# Altium PCB DIOT_Sampler 20spacin.PCBDOC (part 1 of 8)
Units mm, origin at the board's own origin, x right, y up, seen from the top; angles counter-clockwise.
Board outline 222.37 x 100 mm, 4 copper layers (Top, GP1(GND), L3, Bot), stack 1.648 mm thick; 680 components, 424 nets, 2212 pads, 808 vias.
Unrouted connection lines stored in the file: 327.
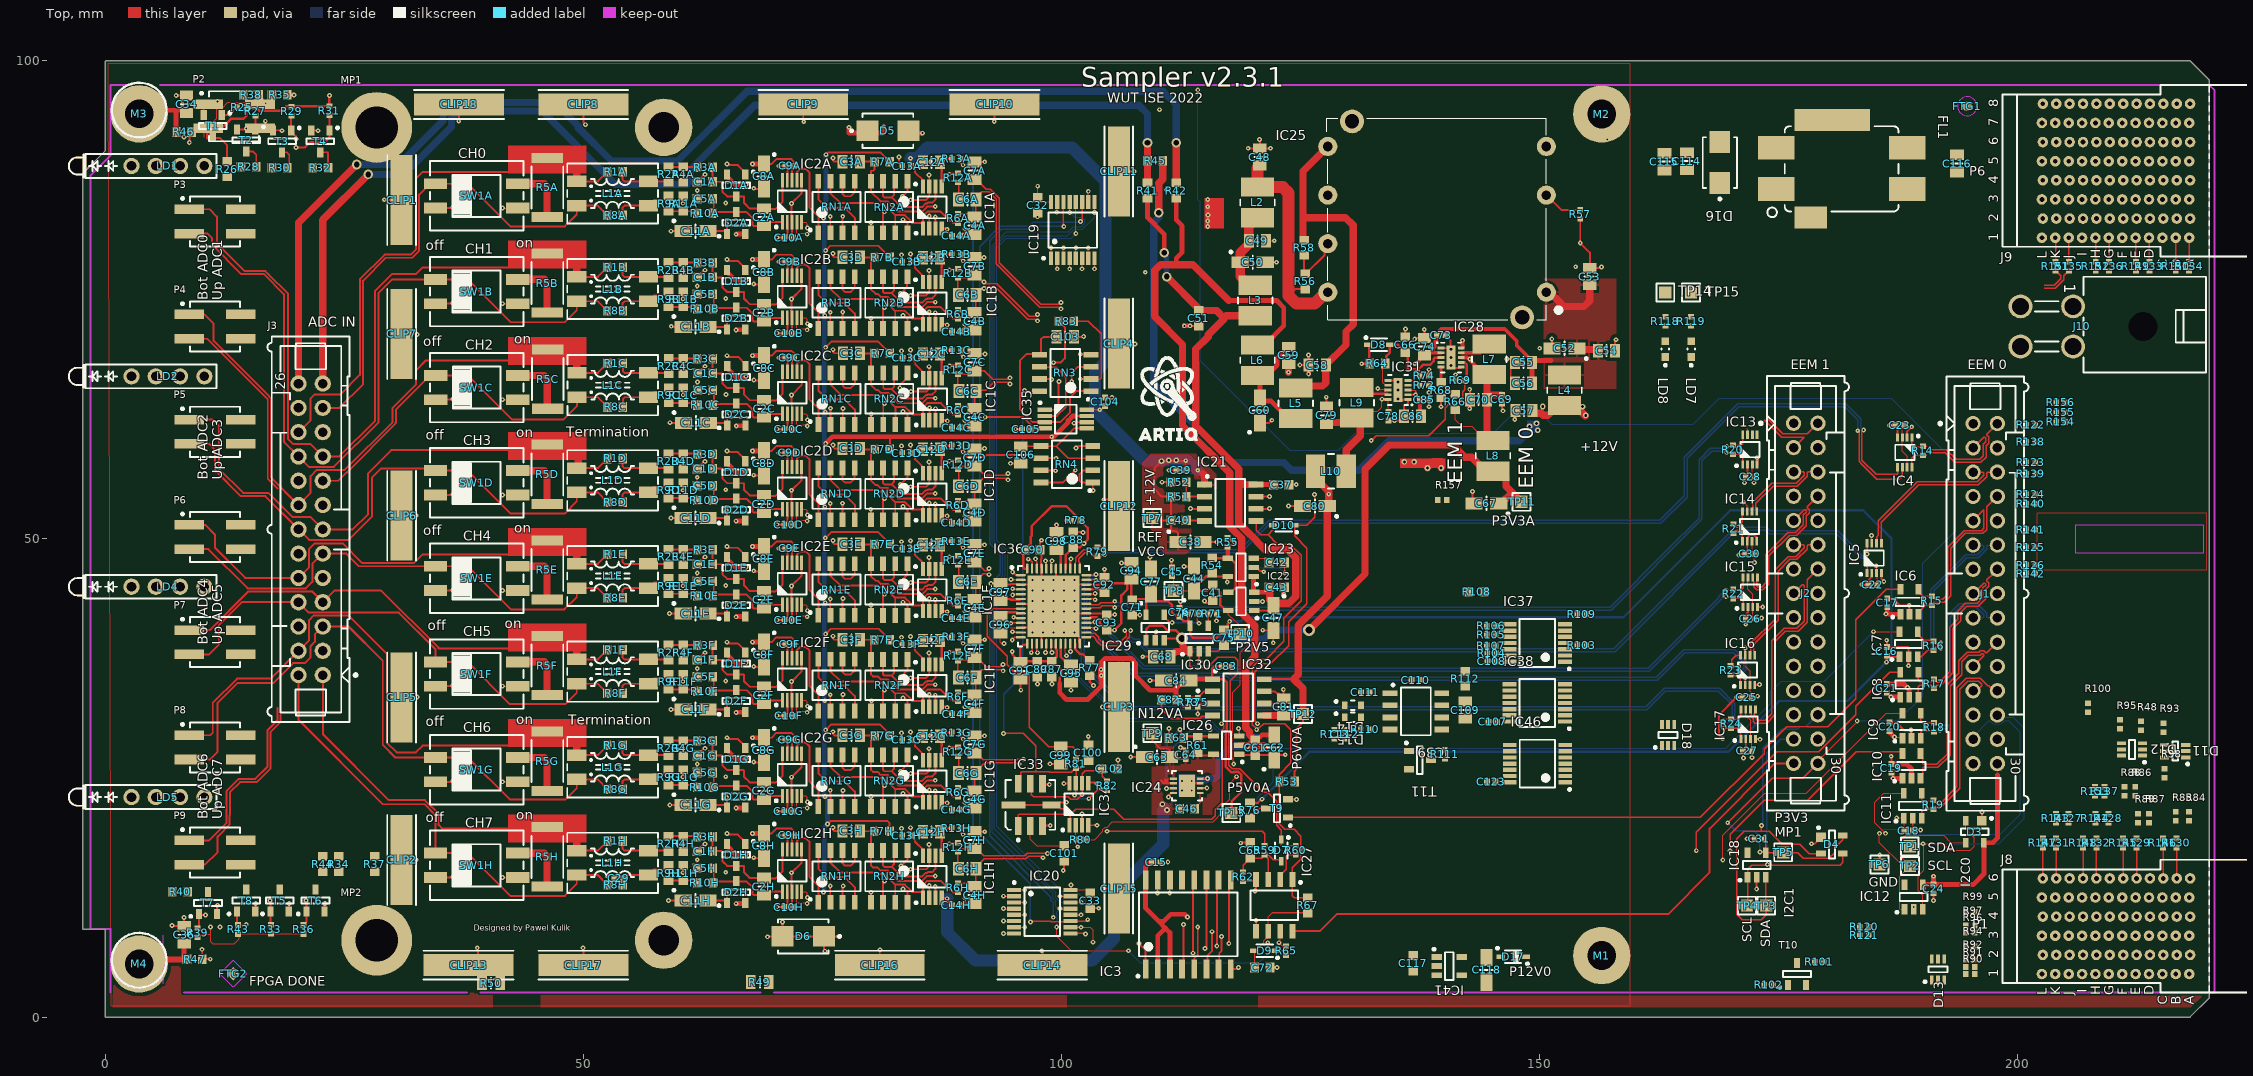
[diagram p0: Top view]
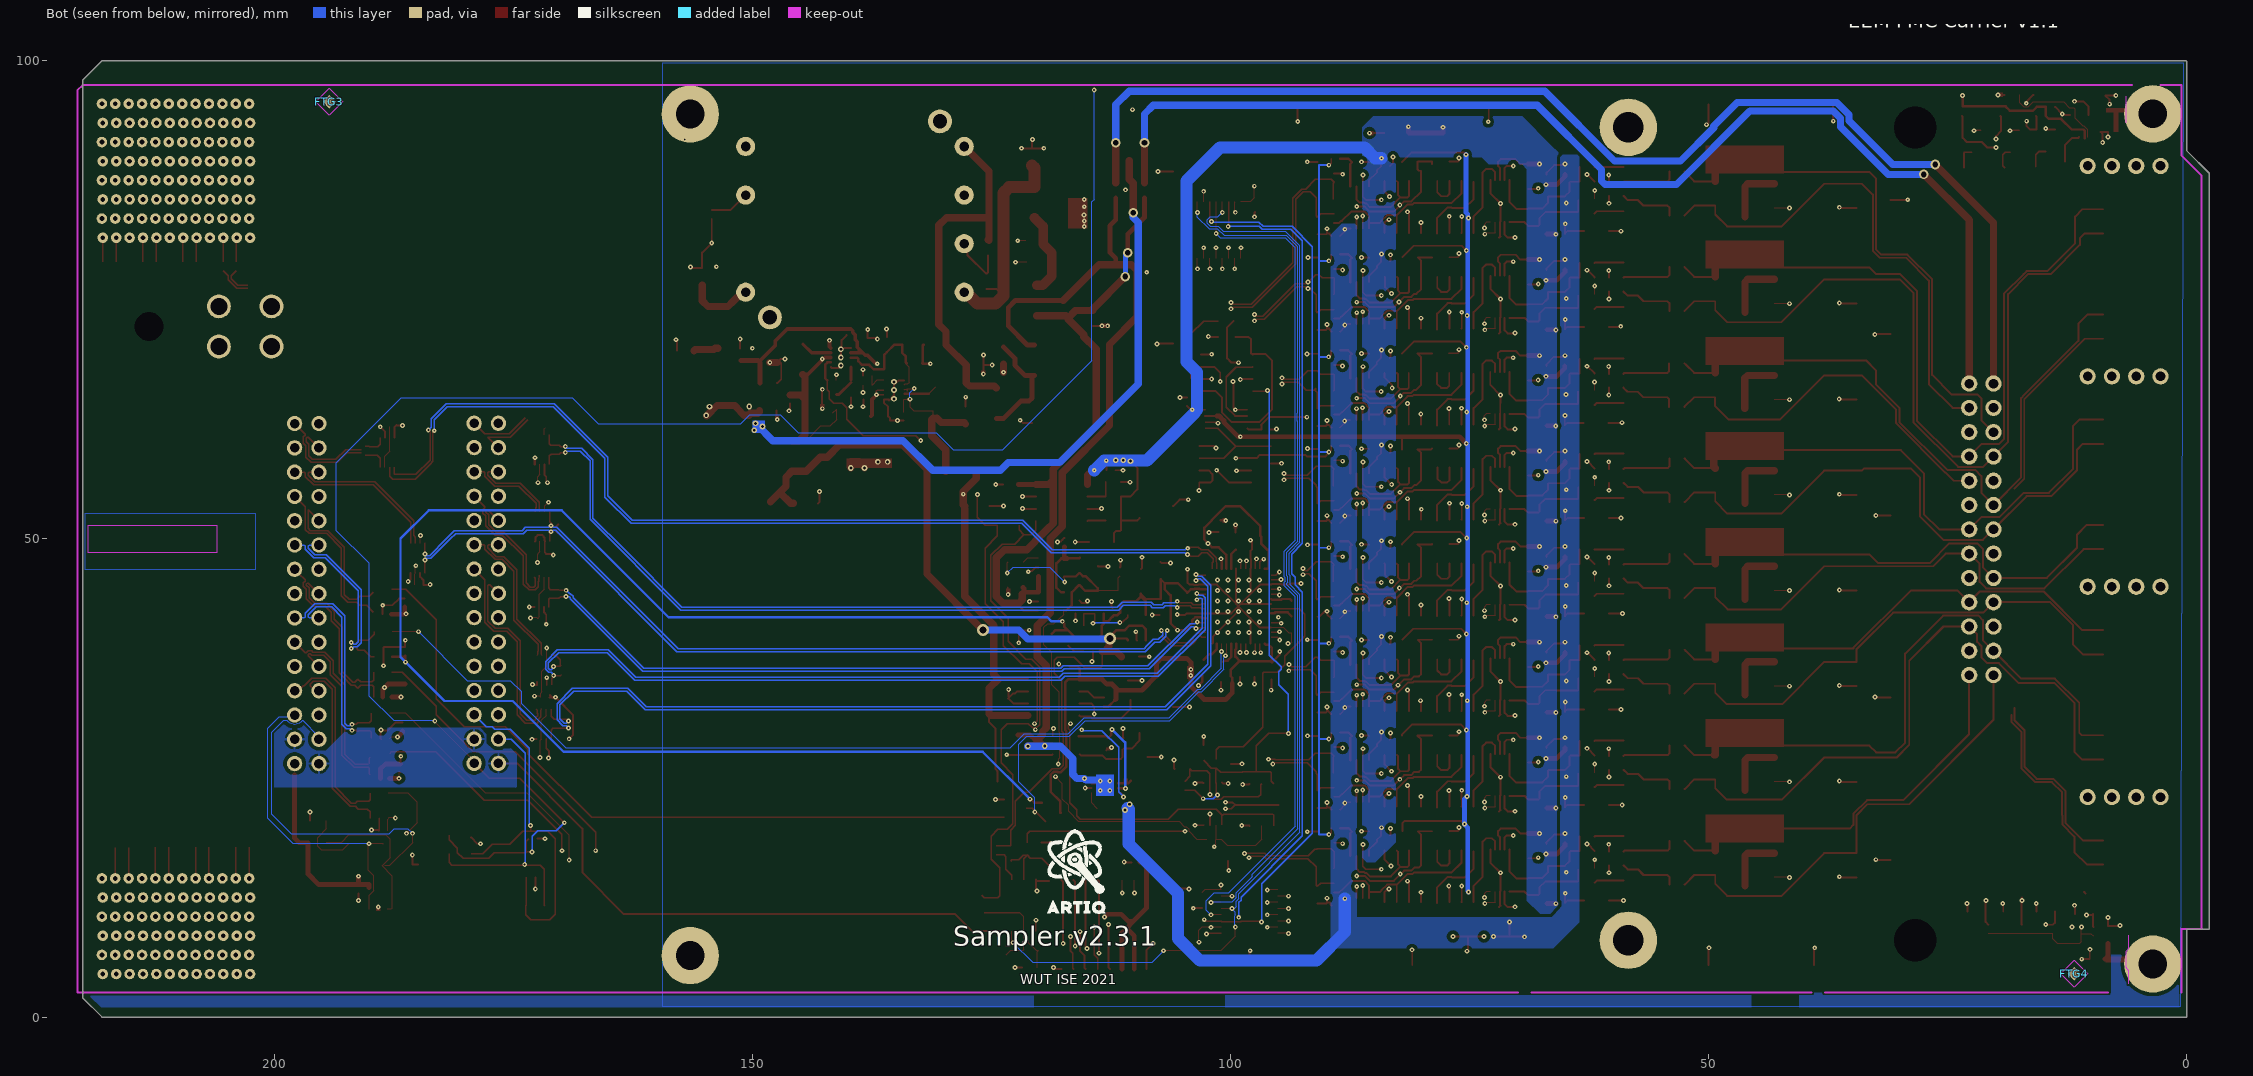
[diagram p1: Bot view, seen from below]
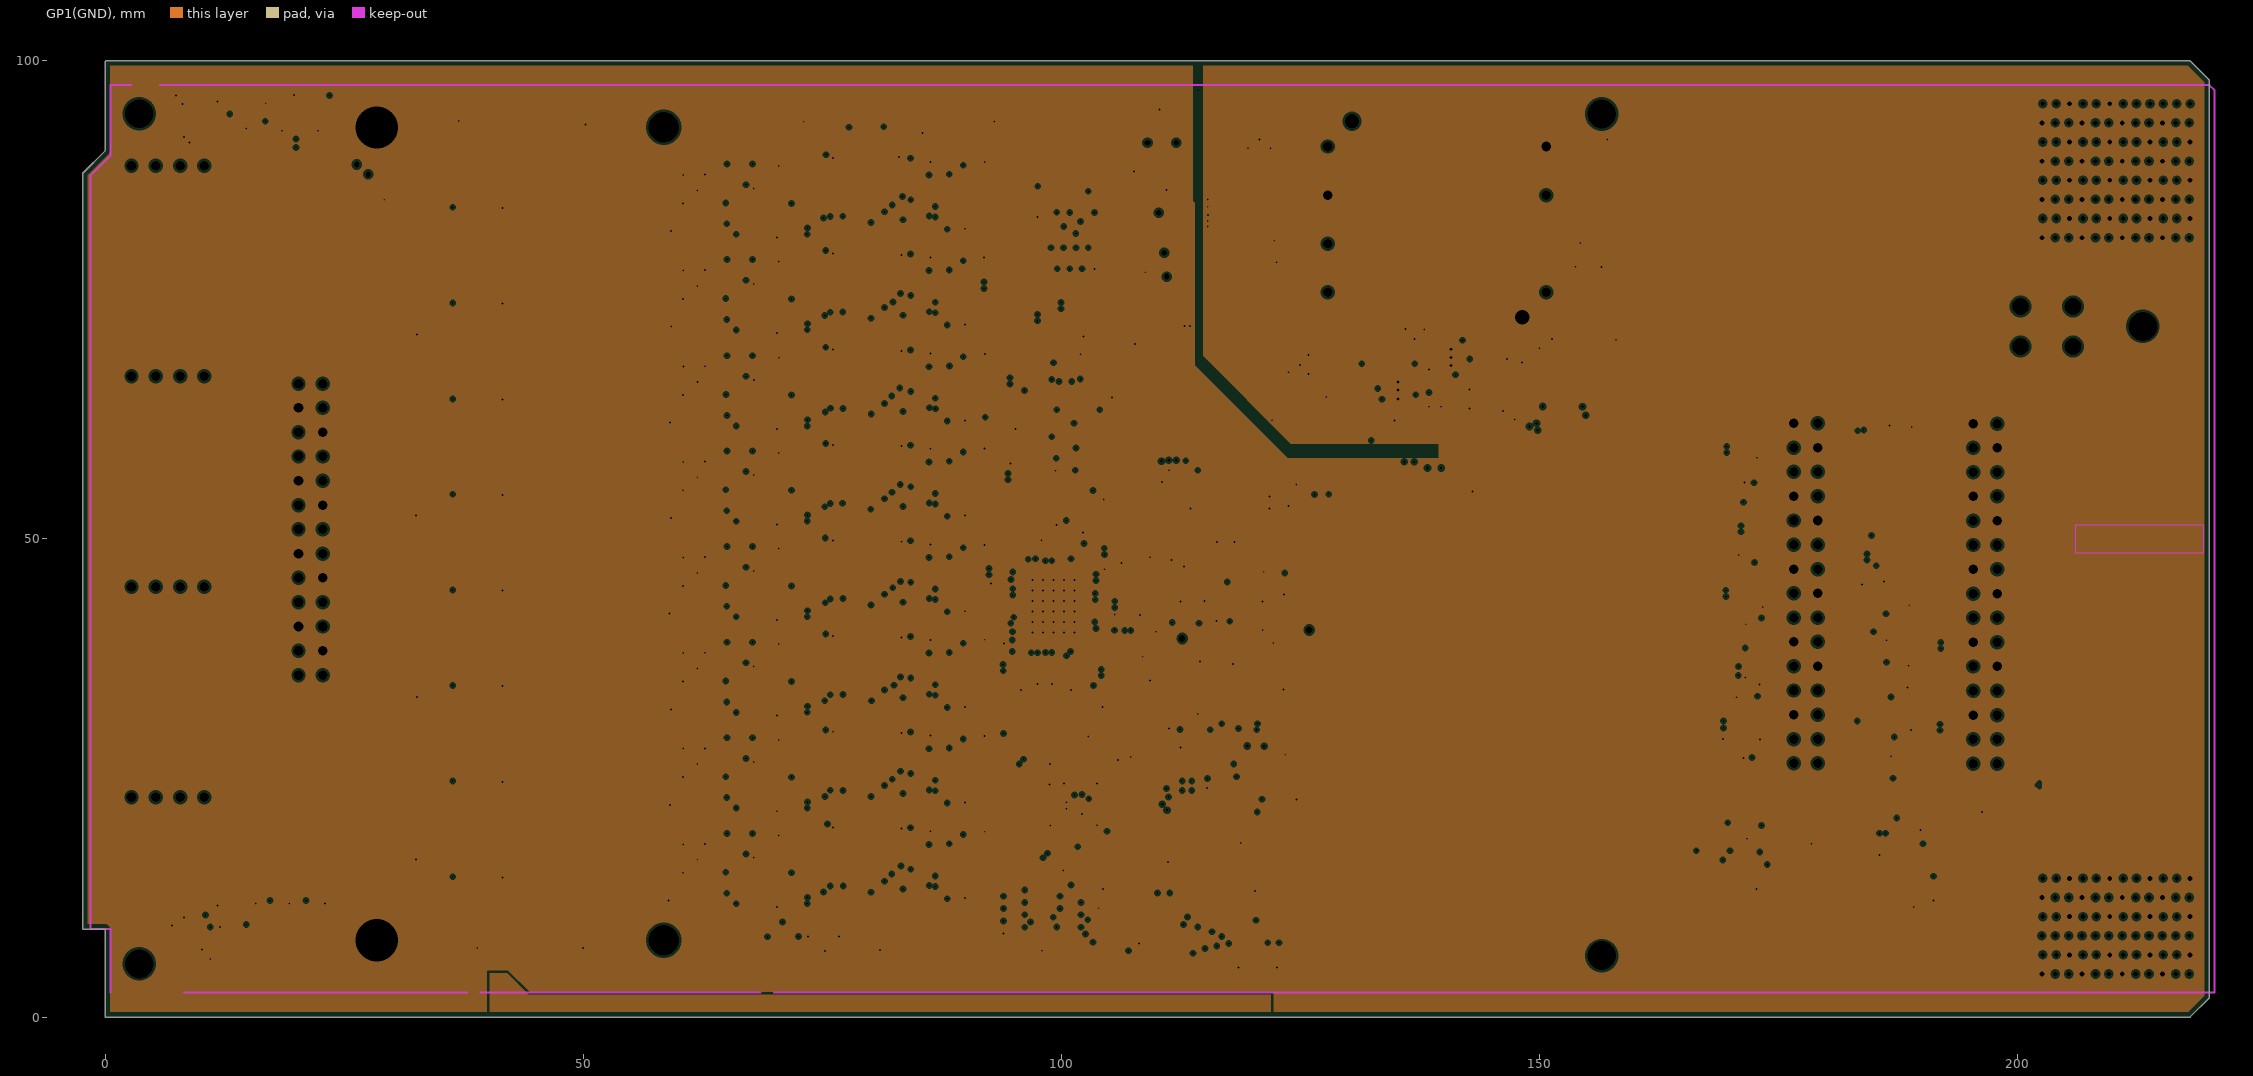
[diagram p2: GP1(GND), clearances drawn from the general rule]
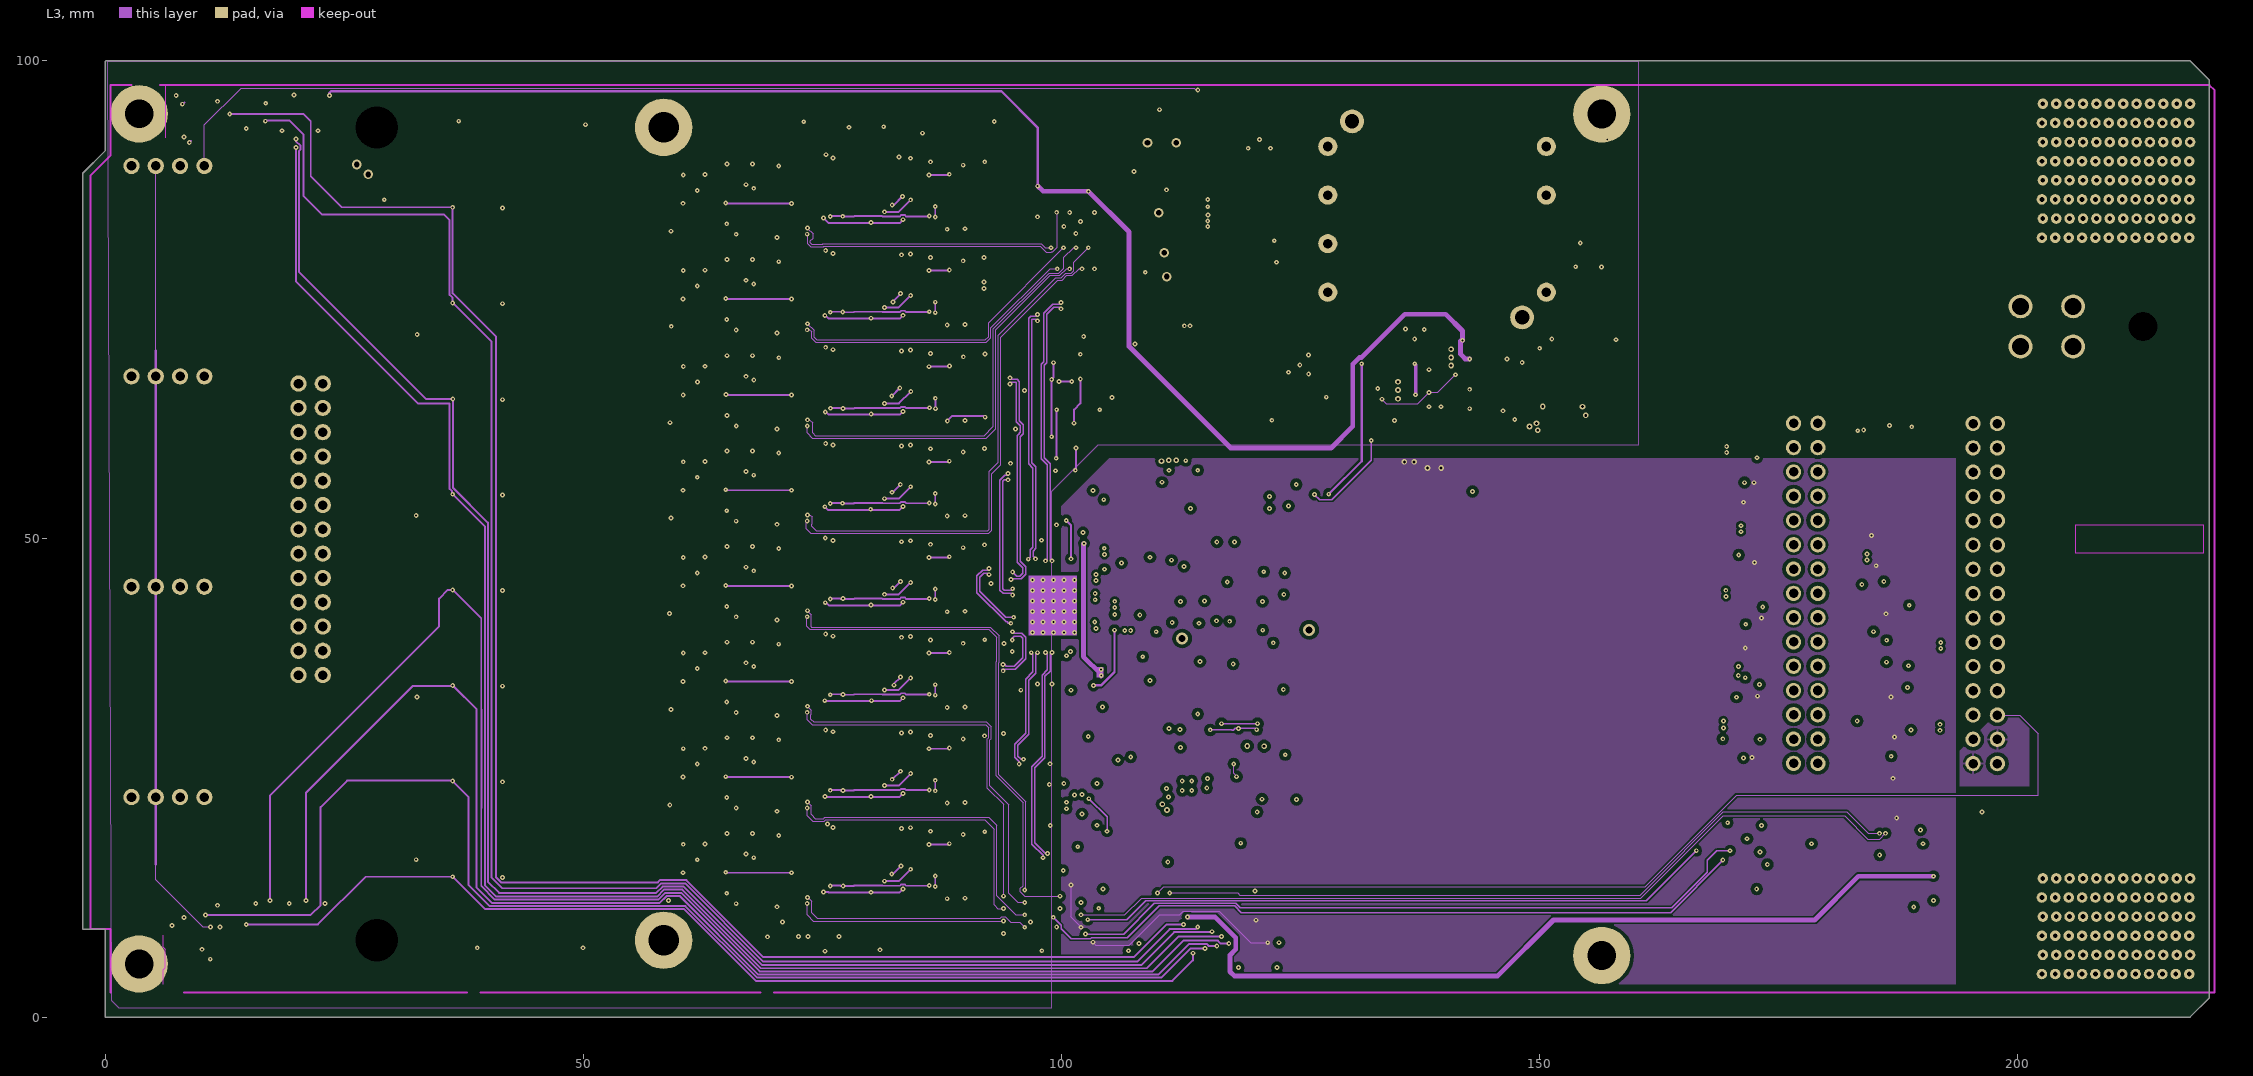
[diagram p3: L3]

## Layer stack, top to bottom
TopSolder: solder mask 0.0102, Solder Resist, Dk 3.5
Top: signal copper 0.058
Dielectric1: core 0.18, FR-4, Dk 4.8
GP1(GND): plane copper 0.036, net GND
Dielectric 3: prepreg 1.1, Dk 4.2
L3: signal copper 0.036
Dielectric2: core 0.18, FR-4, Dk 4.2
Bot: signal copper 0.058
BottomSolder: solder mask 0.0102, Solder Resist, Dk 3.5

## Board outline
-2.33,9.2 -2.33,88.245 0,90.575 0,99.899 0.101,100 218.039,100 220.039,98 220.039,2 218.039,0 0,0 0,9.2

## Design rules (kind name [scope] priority, off if disabled: settings)
AcuteAngle [All] p1: minimum=6.00000000000000E+0001 checktracksonly=FALSE
Clearance Clearance_DIFF [(InDifferentialPairClass('All Differential Pairs'))] p1: gap=0.127 ignorepadtopadclearanceinfootprint=FALSE except(0: Arc-Hole Track-Hole SMDPad-Hole THPad-Hole Via-Hole Fill-Hole Poly-Hole Region-Hole Text-Hole; 0.254: Arc-Poly Track-Poly SMDPad-Poly THPad-Poly Via-Poly Fill-Poly Poly-Poly Poly-Region Poly-Text)
Clearance [All] p2: gap=0.127 ignorepadtopadclearanceinfootprint=FALSE except(0: Arc-Hole Track-Hole SMDPad-Hole THPad-Hole Via-Hole Fill-Hole Poly-Hole Region-Hole Text-Hole; 0.203: Track-Poly; 0.381: Arc-Poly SMDPad-Poly THPad-Poly Via-Poly Fill-Poly Poly-Poly)
ComponentClearance [All] p1 off: gap=0.254 collisioncheckmode=3 verticalgap=0.254 showdistances=FALSE
DiffPairsRouting [All] p1: maxlimit=0.178 minlimit=0.152 mostfreqgap=0.152 toplayer_minwidth=0.127 toplayer_maxwidth=0.152 toplayer_prefwidth=0.152 midlayer1_minwidth=0.127 midlayer1_maxwidth=0.152 midlayer1_prefwidth=0.152 bottomlayer_minwidth=0.127 bottomlayer_maxwidth=0.152 bottomlayer_prefwidth=0.152 maxuncoupledlength=12.7
FabricationTestPointUsage TestPointUsage [All] p1: valid=0 allowmultiple=FALSE
FabricationTestpoint Testpoint [All] p1: side=3 testpointundercomponent=TRUE minsize=1.016 maxsize=2.54 preferedsize=1.524 minholesize=0.508 maxholesize=1.016 preferedholesize=0.813 testpointgrid=0.025 allowsidetop=TRUE allowsidebottom=TRUE usegrid=TRUE gridtolerance=0
Height [All] p1 off: minheight=0 maxheight=25.4 prefheight=12.7
HoleSize [All] p1: absolutevalues=TRUE maxlimit=3.81 minlimit=0.025 maxpercent=80.000 minpercent=20.000
HoleToHoleClearance [All] p1: gap=0.025 allowstackedmicrovias=TRUE
MinimumSolderMaskSliver [All] p1: minsoldermaskwidth=0
PlaneClearance [All] p1: clearance=0.254
PlaneConnect [All] p1: planeconnectstyle=Direct reliefexpansion=0.508 reliefentries=4 reliefconductorwidth=0.254 reliefairgap=0.254
PolygonConnect PolygonConnect_pad [(InPadClass('All Pads'))] p1: connectstyle=Relief reliefconductorwidth=0.254 reliefentries=4 polygonreliefangle="90 Angle" airgapwidth=0.254
PolygonConnect [All] p2: connectstyle=Direct reliefconductorwidth=0.254 reliefentries=4 polygonreliefangle="45 Angle" airgapwidth=0.254
RoutingVias [All] p1: holewidth=0.2 width=0.5 viastyle="Through Hole" minholewidth=0.2 minwidth=0.5 maxholewidth=0.711 maxwidth=1.27
SilkToSilkClearance [All] p1: silktosilkclearance=0
SilkToSolderMaskClearance SilkscreenOverComponentPads [IsPad] p1: minsilkscreentomaskgap=0 clearancetoexposedcopper=TRUE
SolderMaskExpansion [All] p1: expansion=0.051 istentingtop=FALSE
SupplyNets "Schematic Supply Nets_8" [InNet('P3V3_MP2')] p1: voltage=0.000
SupplyNets "Schematic Supply Nets_27" [InNet('STRIP1')] p2: voltage=0.000
SupplyNets "Schematic Supply Nets_26" [InNet('P13V0S')] p3: voltage=0.000
SupplyNets "Schematic Supply Nets_25" [InNet('N12V0A')] p4: voltage=0.000
SupplyNets "Schematic Supply Nets_24" [InNet('P12V0_DIOT')] p5: voltage=0.000
SupplyNets "Schematic Supply Nets_23" [InNet('P3V3_DIOT')] p6: voltage=0.000
SupplyNets "Schematic Supply Nets_22" [InNet('P3V3_MP1')] p7: voltage=0.000
SupplyNets "Schematic Supply Nets_21" [InNet('P13V0')] p8: voltage=0.000
SupplyNets "Schematic Supply Nets_20" [InNet('P3V3')] p9: voltage=0.000
SupplyNets "Schematic Supply Nets_19" [InNet('P5V0A')] p10: voltage=0.000
SupplyNets "Schematic Supply Nets_18" [InNet('P3V3_MP')] p11: voltage=0.000
SupplyNets "Schematic Supply Nets_16" [InNet('REF_P2V048')] p12: voltage=0.000
SupplyNets "Schematic Supply Nets_14" [InNet('REF_P1V7066')] p13: voltage=0.000
SupplyNets "Schematic Supply Nets_13" [InNet('P6V0A')] p14: voltage=0.000
SupplyNets "Schematic Supply Nets_11" [InNet('REF_VCC')] p15: voltage=0.000
SupplyNets "Schematic Supply Nets_10" [InNet('GND')] p16: voltage=0.000
SupplyNets "Schematic Supply Nets_9" [InNet('P2V5A')] p17: voltage=0.000
SupplyNets "Schematic Supply Nets_7" [InNet('N13V0')] p18: voltage=0.000
SupplyNets "Schematic Supply Nets_6" [InNet('P12V0A')] p19: voltage=0.000
SupplyNets "Schematic Supply Nets_5" [InNet('P3V3A')] p20: voltage=0.000
SupplyNets "Schematic Supply Nets_4" [InNet('N13V0S')] p21: voltage=0.000
SupplyNets "Schematic Supply Nets_3" [InNet('P12V0')] p22: voltage=0.000
SupplyNets "Schematic Supply Nets_2" [InNet('REF_P4V096')] p23: voltage=0.000
SupplyNets "Schematic Supply Nets_1" [InNet('P3V3_MP0')] p24: voltage=0.000
SupplyNets "Schematic Supply Nets" [InNet('P6V0')] p25: voltage=0.000
Width [All] p1: maxlimit=1.27 minlimit=0.127 preferedwidth=0.127
18 further rules are at their usual default settings.

## Classes and differential pairs
net class LVDS_DUAL_P[0..4]: LVDS_DUAL_P0 LVDS_DUAL_P1 LVDS_DUAL_P2 LVDS_DUAL_P3 LVDS_DUAL_P4
net class LVDS_DUAL_N[0..4]: LVDS_DUAL_N0 LVDS_DUAL_N1 LVDS_DUAL_N2 LVDS_DUAL_N3 LVDS_DUAL_N4
net class SHARED_BUS_[0..4]: SHARED_BUS_0 SHARED_BUS_1 SHARED_BUS_2 SHARED_BUS_3 SHARED_BUS_4
net class GA[0..3]: GA0 GA1 GA2 GA3
net class EEM_IO.LVDS_P[0..15]: EEM_IO.LVDS_P0 EEM_IO.LVDS_P1 EEM_IO.LVDS_P2 EEM_IO.LVDS_P3 EEM_IO.LVDS_P4 EEM_IO.LVDS_P5 EEM_IO.LVDS_P6 EEM_IO.LVDS_P7 EEM_IO.LVDS_P8 EEM_IO.LVDS_P9 EEM_IO.LVDS_P10 EEM_IO.LVDS_P11 EEM_IO.LVDS_P12 EEM_IO.LVDS_P13 EEM_IO.LVDS_P14 EEM_IO.LVDS_P15
net class EEM_IO.LVDS_N[0..15]: EEM_IO.LVDS_N0 EEM_IO.LVDS_N1 EEM_IO.LVDS_N2 EEM_IO.LVDS_N3 EEM_IO.LVDS_N4 EEM_IO.LVDS_N5 EEM_IO.LVDS_N6 EEM_IO.LVDS_N7 EEM_IO.LVDS_N8 EEM_IO.LVDS_N9 EEM_IO.LVDS_N10 EEM_IO.LVDS_N11 EEM_IO.LVDS_N12 EEM_IO.LVDS_N13 EEM_IO.LVDS_N14 EEM_IO.LVDS_N15
net class BP_IO.LVDS_P[0..15]: BP_IO.LVDS_P0 BP_IO.LVDS_P1 BP_IO.LVDS_P2 BP_IO.LVDS_P3 BP_IO.LVDS_P4 BP_IO.LVDS_P5 BP_IO.LVDS_P6 BP_IO.LVDS_P7 BP_IO.LVDS_P8 BP_IO.LVDS_P9 BP_IO.LVDS_P10 BP_IO.LVDS_P11 BP_IO.LVDS_P12 BP_IO.LVDS_P13 BP_IO.LVDS_P14 BP_IO.LVDS_P15
net class BP_IO.LVDS_N[0..15]: BP_IO.LVDS_N0 BP_IO.LVDS_N1 BP_IO.LVDS_N2 BP_IO.LVDS_N3 BP_IO.LVDS_N4 BP_IO.LVDS_N5 BP_IO.LVDS_N6 BP_IO.LVDS_N7 BP_IO.LVDS_N8 BP_IO.LVDS_N9 BP_IO.LVDS_N10 BP_IO.LVDS_N11 BP_IO.LVDS_N12 BP_IO.LVDS_N13 BP_IO.LVDS_N14 BP_IO.LVDS_N15
component class U_PWR_Supply: C113 C114 C115 C116 C117 C118 D16 D17 FL1 IC40 IC41 J10 LD6 LD7 LD8 R114 R115 R116 R117 R118 R119 TP14 TP15
component class EEM_Connectors: C119 C120 C121 C122 C123 D18 IC42 IC43 IC44 IC45 IC46 IC3000 IC3003 J1 J2 R100 R120 R121 R122 R123 R124 R125 R126 R127 R128 R129 R130 R131 R132 R133 R134 R135 R136 R137 R138 R139 R140 R141 R142 R143 R144 R145 R146 R147 R148 R149 R150 R151 R152 R153 R154 R155 R156
component class CPCIS_Connectors_P1_P6: C107 C108 C109 C110 C111 C112 D11 D12 D13 D14 D15 IC37 IC38 IC39 J8 J9 R48 R84 R85 R86 R87 R88 R89 R90 R91 R92 R93 R94 R95 R96 R97 R98 R99 R101 R102 R103 R104 R105 R106 R107 R108 R109 R110 R111 R112 R113 T10 T11
component class U_LVDS_EEM1: C25 C26 C27 C28 C29 C30 C31 D4 IC13 IC14 IC15 IC16 IC17 IC18 R20 R21 R22 R23 R24 TP3 TP4 TP5 TP6
net class TERM_STAT[7..0]: TERM_STAT0 TERM_STAT1 TERM_STAT2 TERM_STAT3 TERM_STAT4 TERM_STAT5 TERM_STAT6 TERM_STAT7
channel class Input_channel: U_Input_channel1 U_Input_channel2 U_Input_channel3 U_Input_channel4 U_Input_channel5 U_Input_channel6 U_Input_channel7 U_Input_channel8
component class U_Supply: C37 C38 C39 C40 C41 C42 C43 C44 C45 C46 C47 C48 C49 C50 C51 C52 C53 C54 C55 C56 C57 C58 C59 C60 C61 C62 C63 C64 C65 C66 C67 C68 C69 C70 C71 C72 C73 C74 C75 C76 C77 C78 C79 C80 C81 C82 C83 C84 C85 C86 D5 D6 D7 D8 D9 D10 IC21 IC22 IC23 IC24 IC25 IC26 IC27 IC28 IC29 IC30 IC31 IC32 L2 L3 L4 L5 L6 L7 L8 L9 L10 R51 R52 R53 R54 R55 R56 R57 R58 R59 R60 R61 R62 R63 R64 R65 R66 R67 R68 R69 R70 R71 R72 R73 R74 R75 R157 TP7 TP8 TP9 TP10 TP11 TP12 TP13
component class U_Input_channel8: C1H C2H C3H C4H C5H C6H C7H C8H C9H C10H C11H C12H C13H C14H D1H D2H IC1H IC2H L1H R1H R2H R3H R4H R5H R6H R7H R8H R9H R10H R11H R12H R13H RN1H RN2H SW1H
component class U_Input_channel7: C1G C2G C3G C4G C5G C6G C7G C8G C9G C10G C11G C12G C13G C14G D1G D2G IC1G IC2G L1G R1G R2G R3G R4G R5G R6G R7G R8G R9G R10G R11G R12G R13G RN1G RN2G SW1G
component class U_Input_channel6: C1F C2F C3F C4F C5F C6F C7F C8F C9F C10F C11F C12F C13F C14F D1F D2F IC1F IC2F L1F R1F R2F R3F R4F R5F R6F R7F R8F R9F R10F R11F R12F R13F RN1F RN2F SW1F
component class U_Input_channel5: C1E C2E C3E C4E C5E C6E C7E C8E C9E C10E C11E C12E C13E C14E D1E D2E IC1E IC2E L1E R1E R2E R3E R4E R5E R6E R7E R8E R9E R10E R11E R12E R13E RN1E RN2E SW1E
component class U_Input_channel4: C1D C2D C3D C4D C5D C6D C7D C8D C9D C10D C11D C12D C13D C14D D1D D2D IC1D IC2D L1D R1D R2D R3D R4D R5D R6D R7D R8D R9D R10D R11D R12D R13D RN1D RN2D SW1D
component class U_Input_channel3: C1C C2C C3C C4C C5C C6C C7C C8C C9C C10C C11C C12C C13C C14C D1C D2C IC1C IC2C L1C R1C R2C R3C R4C R5C R6C R7C R8C R9C R10C R11C R12C R13C RN1C RN2C SW1C
component class U_Input_channel2: C1B C2B C3B C4B C5B C6B C7B C8B C9B C10B C11B C12B C13B C14B D1B D2B IC1B IC2B L1B R1B R2B R3B R4B R5B R6B R7B R8B R9B R10B R11B R12B R13B RN1B RN2B SW1B
component class U_Input_channel1: C1A C2A C3A C4A C5A C6A C7A C8A C9A C10A C11A C12A C13A C14A D1A D2A IC1A IC2A L1A R1A R2A R3A R4A R5A R6A R7A R8A R9A R10A R11A R12A R13A RN1A RN2A SW1A
component class U_ADC_8CH: C87 C88 C89 C90 C91 C92 C93 C94 C95 C96 C97 C98 C99 C100 C101 C102 C103 C104 C105 C106 IC33 IC34 IC35 IC36 R76 R77 R78 R79 R80 R81 R82 R83 RN3 RN4 T9
component class Sampler: C32 C33 C34 C36 CLIP1 CLIP2 CLIP3 CLIP4 CLIP5 CLIP6 CLIP7 CLIP8 CLIP9 CLIP10 CLIP11 CLIP12 CLIP13 CLIP14 CLIP15 CLIP16 CLIP17 CLIP18 FTG1 FTG2 FTG3 FTG4 IC19 IC20 J3 LD1 LD2 LD3 LD4 LD5 M1 M2 M3 M4 MP1 MP2 P2 P3 P4 P5 P6 P7 P8 P9 R25 R26 R27 R28 R29 R30 R31 R32 R33 R34 R35 R36 R37 R38 R39 R40 R41 R42 R43 R44 R45 R46 R47 R49 R50 T1 T2 T3 T4 T5 T6 T7 T8
component class U_LVDS_EEM0: C15 C16 C17 C18 C19 C20 C21 C22 C23 C24 D3 IC3 IC4 IC5 IC6 IC7 IC8 IC9 IC10 IC11 IC12 R14 R15 R16 R17 R18 R19 TP1 TP2
differential pair LVDS_DUAL4: +LVDS_DUAL_P4 -LVDS_DUAL_N4
differential pair LVDS_DUAL3: +LVDS_DUAL_P3 -LVDS_DUAL_N3
differential pair LVDS_DUAL2: +LVDS_DUAL_P2 -LVDS_DUAL_N2
differential pair LVDS_DUAL1: +LVDS_DUAL_P1 -LVDS_DUAL_N1
differential pair LVDS_DUAL0: +LVDS_DUAL_P0 -LVDS_DUAL_N0
differential pair PE_CLK: +PE_CLK_P -PE_CLK_N
differential pair PE_CLK.CLK: +PE_CLK.CLK_P -PE_CLK.CLK_N
differential pair EEM_IO.LVDS15: +EEM_IO.LVDS_P15 -EEM_IO.LVDS_N15
differential pair EEM_IO.LVDS14: +EEM_IO.LVDS_P14 -EEM_IO.LVDS_N14
differential pair EEM_IO.LVDS13: +EEM_IO.LVDS_P13 -EEM_IO.LVDS_N13
differential pair EEM_IO.LVDS12: +EEM_IO.LVDS_P12 -EEM_IO.LVDS_N12
differential pair EEM_IO.LVDS11: +EEM_IO.LVDS_P11 -EEM_IO.LVDS_N11
differential pair EEM_IO.LVDS10: +EEM_IO.LVDS_P10 -EEM_IO.LVDS_N10
differential pair EEM_IO.LVDS9: +EEM_IO.LVDS_P9 -EEM_IO.LVDS_N9
differential pair EEM_IO.LVDS8: +EEM_IO.LVDS_P8 -EEM_IO.LVDS_N8
differential pair EEM_IO.LVDS7: +EEM_IO.LVDS_P7 -EEM_IO.LVDS_N7
differential pair EEM_IO.LVDS6: +EEM_IO.LVDS_P6 -EEM_IO.LVDS_N6
differential pair EEM_IO.LVDS5: +EEM_IO.LVDS_P5 -EEM_IO.LVDS_N5
differential pair BP_MGT_Tx: +BP_MGT_Tx_P -BP_MGT_Tx_N
differential pair BP_MGT_Rx: +BP_MGT_Rx_P -BP_MGT_Rx_N
differential pair BP_MGT.Tx: +BP_MGT.Tx_P -BP_MGT.Tx_N
differential pair BP_MGT.Rx: +BP_MGT.Rx_P -BP_MGT.Rx_N
differential pair BP_IO.LVDS15: +BP_IO.LVDS_P15 -BP_IO.LVDS_N15
differential pair BP_IO.LVDS14: +BP_IO.LVDS_P14 -BP_IO.LVDS_N14
differential pair BP_IO.LVDS13: +BP_IO.LVDS_P13 -BP_IO.LVDS_N13
differential pair BP_IO.LVDS12: +BP_IO.LVDS_P12 -BP_IO.LVDS_N12
differential pair BP_IO.LVDS11: +BP_IO.LVDS_P11 -BP_IO.LVDS_N11
differential pair BP_IO.LVDS10: +BP_IO.LVDS_P10 -BP_IO.LVDS_N10
differential pair BP_IO.LVDS9: +BP_IO.LVDS_P9 -BP_IO.LVDS_N9
differential pair BP_IO.LVDS8: +BP_IO.LVDS_P8 -BP_IO.LVDS_N8
differential pair BP_IO.LVDS7: +BP_IO.LVDS_P7 -BP_IO.LVDS_N7
differential pair BP_IO.LVDS6: +BP_IO.LVDS_P6 -BP_IO.LVDS_N6
differential pair BP_IO.LVDS5: +BP_IO.LVDS_P5 -BP_IO.LVDS_N5
differential pair BP_IO.LVDS4: +BP_IO.LVDS_P4 -BP_IO.LVDS_N4
differential pair BP_IO.LVDS3: +BP_IO.LVDS_P3 -BP_IO.LVDS_N3
differential pair BP_IO.LVDS2: +BP_IO.LVDS_P2 -BP_IO.LVDS_N2
differential pair BP_IO.LVDS1: +BP_IO.LVDS_P1 -BP_IO.LVDS_N1
differential pair BP_IO.LVDS0: +BP_IO.LVDS_P0 -BP_IO.LVDS_N0
differential pair ADC_CLKOUT: +ADC_CLKOUT_P -ADC_CLKOUT_N
differential pair ADC_SCK: +ADC_SCK_P -ADC_SCK_N
differential pair ADC_SDOA: +ADC_SDOA_P -ADC_SDOA_N
differential pair ADC_SDOB: +ADC_SDOB_P -ADC_SDOB_N
differential pair ADC_SDOC: +ADC_SDOC_P -ADC_SDOC_N
differential pair ADC_SDOD: +ADC_SDOD_P -ADC_SDOD_N
differential pair IN_0: +IN_0_P -IN_0_N
differential pair IN_1: +IN_1_P -IN_1_N
differential pair IN_2: +IN_2_P -IN_2_N
differential pair IN_3: +IN_3_P -IN_3_N
differential pair IN_4: +IN_4_P -IN_4_N
differential pair IN_5: +IN_5_P -IN_5_N
differential pair IN_6: +IN_6_P -IN_6_N
differential pair IN_7: +IN_7_P -IN_7_N

## Components (designator, comment, footprint, x,y, rotation, side; value= is the part's Value field where it differs from the comment)
C1A "18pF" CAPC1608X87N 62.732,87.348 r0 top (schematic designator C1)
C1B "18pF" CAPC1608X87N 62.732,77.348 r0 top (schematic designator C1)
C1C "18pF" CAPC1608X87N 62.745,67.304 r0 top (schematic designator C1)
C1D "18pF" CAPC1608X87N 62.732,57.348 r0 top (schematic designator C1)
C1E "18pF" CAPC1608X87N 62.732,47.348 r0 top (schematic designator C1)
C1F "18pF" CAPC1608X87N 62.732,37.348 r0 top (schematic designator C1)
C1G "18pF" CAPC1608X87N 62.732,27.348 r0 top (schematic designator C1)
C1H "18pF" CAPC1608X87N 62.732,17.348 r0 top (schematic designator C1)
C2A "82pF" CAPC2012X90N 68.899,83.64 r90 top (schematic designator C2)
C2B "82pF" CAPC2012X90N 68.899,73.64 r90 top (schematic designator C2)
C2C "82pF" CAPC2012X90N 68.911,63.597 r90 top (schematic designator C2)
C2D "82pF" CAPC2012X90N 68.899,53.64 r90 top (schematic designator C2)
C2E "82pF" CAPC2012X90N 68.899,43.64 r90 top (schematic designator C2)
C2F "82pF" CAPC2012X90N 68.899,33.64 r90 top (schematic designator C2)
C2G "82pF" CAPC2012X90N 68.899,23.64 r90 top (schematic designator C2)
C2H "82pF" CAPC2012X90N 68.899,13.64 r90 top (schematic designator C2)
C3A "47nF" CAPC2012X135N 78.039,89.455 r0 top (schematic designator C3)
C3B "47nF" CAPC2012X135N 78.039,79.455 r0 top (schematic designator C3)
C3C "47nF" CAPC2012X135N 78.052,69.411 r0 top (schematic designator C3)
C3D "47nF" CAPC2012X135N 78.039,59.455 r0 top (schematic designator C3)
C3E "47nF" CAPC2012X135N 78.039,49.455 r0 top (schematic designator C3)
C3F "47nF" CAPC2012X135N 78.039,39.455 r0 top (schematic designator C3)
C3G "47nF" CAPC2012X135N 78.039,29.455 r0 top (schematic designator C3)
C3H "47nF" CAPC2012X135N 78.039,19.455 r0 top (schematic designator C3)
C4A "2.2nF" CAPC2013X100N 90.923,82.756 r90 top (schematic designator C4)
C4B "2.2nF" CAPC2013X100N 90.923,72.756 r90 top (schematic designator C4)
C4C "2.2nF" CAPC2013X100N 90.936,62.712 r90 top (schematic designator C4)
C4D "2.2nF" CAPC2013X100N 90.923,52.756 r90 top (schematic designator C4)
C4E "2.2nF" CAPC2013X100N 90.923,42.756 r90 top (schematic designator C4)
C4F "2.2nF" CAPC2013X100N 90.923,32.756 r90 top (schematic designator C4)
C4G "2.2nF" CAPC2013X100N 90.923,22.756 r90 top (schematic designator C4)
C4H "2.2nF" CAPC2013X100N 90.923,12.756 r90 top (schematic designator C4)
C5A "18pF" CAPC1608X87N 62.732,85.57 r0 top (schematic designator C5)
C5B "18pF" CAPC1608X87N 62.732,75.57 r0 top (schematic designator C5)
C5C "18pF" CAPC1608X87N 62.745,65.526 r0 top (schematic designator C5)
C5D "18pF" CAPC1608X87N 62.732,55.57 r0 top (schematic designator C5)
C5E "18pF" CAPC1608X87N 62.732,45.57 r0 top (schematic designator C5)
C5F "18pF" CAPC1608X87N 62.732,35.57 r0 top (schematic designator C5)
C5G "18pF" CAPC1608X87N 62.732,25.57 r0 top (schematic designator C5)
C5H "18pF" CAPC1608X87N 62.732,15.57 r0 top (schematic designator C5)
C6A "2.2nF" CAPC2013X100N 90.173,85.506 r0 top (schematic designator C6)
C6B "2.2nF" CAPC2013X100N 90.173,75.506 r0 top (schematic designator C6)
C6C "2.2nF" CAPC2013X100N 90.186,65.462 r0 top (schematic designator C6)
C6D "2.2nF" CAPC2013X100N 90.173,55.506 r0 top (schematic designator C6)
C6E "2.2nF" CAPC2013X100N 90.173,45.506 r0 top (schematic designator C6)
C6F "2.2nF" CAPC2013X100N 90.173,35.506 r0 top (schematic designator C6)
C6G "2.2nF" CAPC2013X100N 90.173,25.506 r0 top (schematic designator C6)
C6H "2.2nF" CAPC2013X100N 90.173,15.506 r0 top (schematic designator C6)
C7A "2.2nF" CAPC2013X100N 90.923,88.506 r90 top (schematic designator C7)
C7B "2.2nF" CAPC2013X100N 90.923,78.506 r90 top (schematic designator C7)
C7C "2.2nF" CAPC2013X100N 90.936,68.462 r90 top (schematic designator C7)
C7D "2.2nF" CAPC2013X100N 90.923,58.506 r90 top (schematic designator C7)
C7E "2.2nF" CAPC2013X100N 90.923,48.506 r90 top (schematic designator C7)
C7F "2.2nF" CAPC2013X100N 90.923,38.506 r90 top (schematic designator C7)
C7G "2.2nF" CAPC2013X100N 90.923,28.506 r90 top (schematic designator C7)
C7H "2.2nF" CAPC2013X100N 90.923,18.506 r90 top (schematic designator C7)
C8A "10uF" CAPMP3216X180N 68.899,87.908 r270 top (schematic designator C8)
C8B "10uF" CAPMP3216X180N 68.899,77.908 r270 top (schematic designator C8)
C8C "10uF" CAPMP3216X180N 68.911,67.864 r270 top (schematic designator C8)
C8D "10uF" CAPMP3216X180N 68.899,57.908 r270 top (schematic designator C8)
C8E "10uF" CAPMP3216X180N 68.899,47.908 r270 top (schematic designator C8)
C8F "10uF" CAPMP3216X180N 68.899,37.908 r270 top (schematic designator C8)
C8G "10uF" CAPMP3216X180N 68.899,27.908 r270 top (schematic designator C8)
C8H "10uF" CAPMP3216X180N 68.899,17.908 r270 top (schematic designator C8)
C9A "100nF" CAPC1005X55N 71.585,88.998 r0 top (schematic designator C9)
C9B "100nF" CAPC1005X55N 71.585,78.998 r0 top (schematic designator C9)
C9C "100nF" CAPC1005X55N 71.598,68.954 r0 top (schematic designator C9)
C9D "100nF" CAPC1005X55N 71.585,58.998 r0 top (schematic designator C9)
C9E "100nF" CAPC1005X55N 71.585,48.998 r0 top (schematic designator C9)
C9F "100nF" CAPC1005X55N 71.585,38.998 r0 top (schematic designator C9)
C9G "100nF" CAPC1005X55N 71.585,28.998 r0 top (schematic designator C9)
C9H "100nF" CAPC1005X55N 71.585,18.998 r0 top (schematic designator C9)
C10A "100nF" CAPC1005X55N 71.485,81.498 r0 top (schematic designator C10)
C10B "100nF" CAPC1005X55N 71.485,71.498 r0 top (schematic designator C10)
C10C "100nF" CAPC1005X55N 71.498,61.454 r0 top (schematic designator C10)
C10D "100nF" CAPC1005X55N 71.485,51.498 r0 top (schematic designator C10)
C10E "100nF" CAPC1005X55N 71.485,41.498 r0 top (schematic designator C10)
C10F "100nF" CAPC1005X55N 71.485,31.498 r0 top (schematic designator C10)
C10G "100nF" CAPC1005X55N 71.485,21.498 r0 top (schematic designator C10)
C10H "100nF" CAPC1005X55N 71.485,11.498 r0 top (schematic designator C10)
C11A "10uF" CAPMP3216X180N 61.764,82.18 r0 top (schematic designator C11)
C11B "10uF" CAPMP3216X180N 61.764,72.18 r0 top (schematic designator C11)
C11C "10uF" CAPMP3216X180N 61.777,62.136 r0 top (schematic designator C11)
C11D "10uF" CAPMP3216X180N 61.764,52.18 r0 top (schematic designator C11)
C11E "10uF" CAPMP3216X180N 61.764,42.18 r0 top (schematic designator C11)
C11F "10uF" CAPMP3216X180N 61.764,32.18 r0 top (schematic designator C11)
C11G "10uF" CAPMP3216X180N 61.764,22.18 r0 top (schematic designator C11)
C11H "10uF" CAPMP3216X180N 61.764,12.18 r0 top (schematic designator C11)
C12A "47nF" CAPC2012X135N 86.414,89.38 r0 top (schematic designator C12)
C12B "47nF" CAPC2012X135N 86.414,79.38 r0 top (schematic designator C12)
C12C "47nF" CAPC2012X135N 86.427,69.336 r0 top (schematic designator C12)
C12D "47nF" CAPC2012X135N 86.414,59.38 r0 top (schematic designator C12)
C12E "47nF" CAPC2012X135N 86.414,49.38 r0 top (schematic designator C12)
C12F "47nF" CAPC2012X135N 86.414,39.38 r0 top (schematic designator C12)
C12G "47nF" CAPC2012X135N 86.414,29.38 r0 top (schematic designator C12)
C12H "47nF" CAPC2012X135N 86.414,19.38 r0 top (schematic designator C12)
C13A "100nF" CAPC1005X55N 83.814,88.98 r0 top (schematic designator C13)
C13B "100nF" CAPC1005X55N 83.814,78.98 r0 top (schematic designator C13)
C13C "100nF" CAPC1005X55N 83.827,68.936 r0 top (schematic designator C13)
C13D "100nF" CAPC1005X55N 83.814,58.98 r0 top (schematic designator C13)
C13E "100nF" CAPC1005X55N 83.814,48.98 r0 top (schematic designator C13)
C13F "100nF" CAPC1005X55N 83.814,38.98 r0 top (schematic designator C13)
C13G "100nF" CAPC1005X55N 83.814,28.98 r0 top (schematic designator C13)
C13H "100nF" CAPC1005X55N 83.814,18.98 r0 top (schematic designator C13)
C14A "100nF" CAPC1005X55N 89.014,81.68 r180 top (schematic designator C14)
C14B "100nF" CAPC1005X55N 89.014,71.68 r180 top (schematic designator C14)
C14C "100nF" CAPC1005X55N 89.027,61.636 r180 top (schematic designator C14)
C14D "100nF" CAPC1005X55N 89.014,51.68 r180 top (schematic designator C14)
C14E "100nF" CAPC1005X55N 89.014,41.68 r180 top (schematic designator C14)
C14F "100nF" CAPC1005X55N 89.014,31.68 r180 top (schematic designator C14)
C14G "100nF" CAPC1005X55N 89.014,21.68 r180 top (schematic designator C14)
C14H "100nF" CAPC1005X55N 89.014,11.68 r180 top (schematic designator C14)
C15 "100nF" CAPC1005X55N 109.939,16.18 r180 top
C16 "100nF" CAPC1005X55N 186.333,38.234 r270 top
C17 "100nF" CAPC1005X55N 186.365,43.312 r270 top
C18 "100nF" CAPC1005X55N 188.617,19.487 r180 top
C19 "100nF" CAPC1005X55N 186.805,26.005 r270 top
C20 "100nF" CAPC1005X55N 186.615,30.362 r270 top
C21 "100nF" CAPC1005X55N 186.315,34.362 r270 top
C22 "100nF" CAPC1005X55N 184.868,45.18 r0 top
C23 "100nF" CAPC1005X55N 187.686,61.901 r0 top
C24 "100nF" CAPC1005X55N 191.21,13.398 r90 top
C25 "100nF" CAPC1005X55N 171.694,33.434 r0 top
C26 "100nF" CAPC1005X55N 172.019,41.673 r0 top
C27 "100nF" CAPC1005X55N 171.738,27.838 r0 top
C28 "100nF" CAPC1005X55N 172.024,56.524 r0 top
C29 "100nF" CAPC1005X55N 53.728,14.512 r180 top
C30 "100nF" CAPC1005X55N 172.014,48.421 r0 top
C31 "100nF" CAPC1005X55N 172.964,18.648 r0 top
C32 "100nF" CAPC1608X87N 97.527,84.886 r90 top
C33 "100nF" CAPC1608X87N 103.014,12.18 r90 top
C34 "Undefined" CAPC2012X135N 8.523,95.455 r90 top
C36 "Undefined" CAPC2012X135N 8.264,8.605 r90 top
C37 "1uF" CAPC1608X87N 123.014,55.68 r180 top
C38 "10uF" CAPMP3216X180N 113.514,49.68 r0 top
C39 "100nF" CAPC1005X55N 112.514,57.18 r0 top
C40 "10nF" CAPC1608X87N 112.264,51.93 r180 top
C41 "1uF" CAPC1608X87N 115.837,44.366 r90 top
C42 "10nF" CAPC1608X87N 122.51,47.535 r0 top
C43 "1uF" CAPC1608X87N 122.514,44.93 r180 top
C44 "10uF" CAPMP3216X180N 113.895,45.857 r90 top
C45 "100nF" CAPC1005X55N 111.591,46.565 r270 top
C46 "10nF" CAPC1608X87N 113.139,21.78 r180 top
C47 "10uF" CAPMP3216X180N 122.164,41.73 r270 top
C48 "22uF" CAPC2012X135N 120.764,89.93 r270 top
C49 "22uF" CAPC2012X135N 120.514,81.18 r180 top
C50 "10uF" CAPMP3216X180N 120.014,78.93 r0 top
C51 "1uF" CAPC1608X87N 114.389,73.08 r90 top
C52 "10uF" CAPMP3216X180N 152.618,69.93 r180 top
C53 "22uF" CAPC2012X135N 155.264,77.43 r270 top
C54 "22uF" CAPC2012X135N 157.014,69.68 r180 top
C55 "22uF" CAPC2012X135N 148.323,68.451 r0 top
C56 "22uF" CAPC2012X135N 148.323,66.292 r0 top
C57 "22uF" CAPC2012X135N 148.374,63.422 r0 top
C58 "22uF" CAPC2012X135N 126.764,68.18 r0 top
C59 "22uF" CAPC2012X135N 123.764,69.18 r90 top
C60 "10uF" CAPMP3216X180N 120.764,63.43 r90 top
C61 "1uF" CAPC1608X87N 120.264,28.18 r90 top
C62 "10uF" CAPMP3216X180N 122.264,28.18 r90 top
C63 "10uF" CAPMP3216X180N 110.014,27.18 r0 top
C64 "100nF" CAPC1005X55N 113.014,27.43 r270 top
C65 "1uF" CAPC1608X87N 119.764,17.43 r270 top
C66 "1uF" CAPC1608X87N 135.961,70.32 r270 top
C67 "10uF" CAPMP3216X180N 144.439,53.714 r180 top
C68 "22uF" CAPC2012X135N 110.514,37.68 r0 top
C69 "100nF" CAPC1005X55N 146.082,64.594 r90 top
C70 "22uF" CAPC2012X135N 143.618,64.568 r0 top
C71 "1uF" CAPC1608X87N 107.43,42.83 r90 top
C72 "1uF" CAPC1608X87N 121.014,5.18 r180 top
C73 "100nF" CAPC1005X55N 139.711,71.32 r180 top
C74 "22uF" CAPC2012X135N 137.979,70.105 r270 top
C75 "10nF" CAPC1608X87N 117.014,39.68 r90 top
C76 "100nF" CAPC1005X55N 112.341,42.322 r270 top
C77 "10uF" CAPMP3216X180N 109.387,45.544 r90 top
C78 "100nF" CAPC1005X55N 134.211,62.82 r90 top
C79 "22uF" CAPC2012X135N 127.731,62.92 r270 top
C80 "10uF" CAPMP3216X180N 126.514,53.43 r180 top
C81 "22uF" CAPC2012X135N 123.264,32.43 r270 top
C82 "10nF" CAPC1608X87N 111.264,33.18 r0 top
C83 "100nF" CAPC1005X55N 117.264,36.68 r180 top
C84 "10uF" CAPMP3216X180N 112.014,35.18 r180 top
C85 "100nF" CAPC1005X55N 137.961,64.57 r180 top
C86 "22uF" CAPC2012X135N 136.711,62.82 r0 top
C87 "100nF" CAPC1608X87N 99.002,36.385 r90 top
C88 "100nF" CAPC1608X87N 101.264,49.93 r270 top
C89 "100nF" CAPC1608X87N 97.503,36.385 r90 top
C90 "100nF" CAPC1608X87N 96.989,48.88 r180 top
C91 "10uF" CAPC2012X95N 95.725,36.207 r90 top
C92 "100nF" CAPC1608X87N 104.514,45.18 r270 top
C93 "100nF" CAPC1608X87N 104.764,41.255 r270 top
C94 "10uF" CAPC2012X95N 107.322,46.68 r270 top
C95 "10uF" CAPC2012X95N 101.014,35.93 r90 top
C96 "10uF" CAPC2012X95N 93.639,41.016 r90 top
C97 "10uF" CAPC2012X95N 93.639,44.445 r270 top
C98 "10uF" CAPC2012X95N 99.485,49.771 r270 top
C99 "10uF" CAPC2012X95N 99.944,27.352 r90 top
C100 "2.2uF" CAPC1608X87N 102.839,27.63 r270 top
C101 "1uF" CAPC1608X87N 100.284,17.116 r90 top
C102 "1uF" CAPC1608X87N 105.064,25.959 r180 top
C103 "47nF" CAPC2012X135N 100.414,71.13 r180 top
C104 "100nF" CAPC1005X55N 104.589,64.355 r270 top
C105 "100nF" CAPC1005X55N 96.339,61.455 r0 top
C106 "47nF" CAPC2012X135N 95.764,58.78 r90 top
C107 "100nF" CAPC1005X55N 145.107,30.873 r0 top
C108 "100nF" CAPC1005X55N 145,37.2 r0 top
C109 "22uF" CAPC2012X135N 142.24,32.097 r90 top
C110 "100nF" CAPC1005X55N 137.084,35.232 r0 top
C111 "100nF" CAPC1005X55N 131.785,33.942 r0 top
C112 "1uF" CAPC1005X55N 129.633,29.592 r90 top
C113 "100nF" CAPC1005X55N 154.413,112.95 r180 top
C114 "10uF" CAPC2012X95N 165.409,89.5 r270 top
C115 "10uF" CAPC2012X95N 163.07,89.45 r270 top
C116 "10uF" CAPC2012X95N 193.67,89.25 r270 top
C117 "1uF" CAPC1608X87N 136.822,5.63 r90 top
C118 "4.7uF" CAPMP3216X180N 144.482,4.93 r270 top
C119 "100nF" CAPC1005X55N 146.814,148.306 r270 top
C120 "100nF" CAPC1005X55N 146.743,138.313 r270 top
C121 "100nF" CAPC1005X55N 139.413,148.306 r270 top
C122 "100nF" CAPC1005X55N 139.413,138.313 r270 top
C123 "100nF" CAPC1005X55N 144.967,24.63 r0 top
CLIP1 "S1411-46R" CLIP_HOLLAND-SHIELDING_LC 31.014,85.43 r90 top
CLIP2 "S1411-46R" CLIP_HOLLAND-SHIELDING_LC 31.014,16.43 r90 top
CLIP3 "S1411-46R" CLIP_HOLLAND-SHIELDING_LC 106.014,32.43 r90 top
CLIP4 "S1411-46R" CLIP_HOLLAND-SHIELDING_LC 106.014,70.43 r90 top
CLIP5 "S1411-46R" CLIP_HOLLAND-SHIELDING_LC 31.014,33.43 r90 top
CLIP6 "S1411-46R" CLIP_HOLLAND-SHIELDING_LC 31.014,52.43 r90 top
CLIP7 "S1411-46R" CLIP_HOLLAND-SHIELDING_LC 31.014,71.43 r90 top
CLIP8 "S1411-46R" CLIP_HOLLAND-SHIELDING_LC 50.014,95.43 r180 top
CLIP9 "S1411-46R" CLIP_HOLLAND-SHIELDING_LC 73.014,95.43 r180 top
CLIP10 "S1411-46R" CLIP_HOLLAND-SHIELDING_LC 93.014,95.43 r180 top
CLIP11 "S1411-46R" CLIP_HOLLAND-SHIELDING_LC 106.014,88.43 r90 top
CLIP12 "S1411-46R" CLIP_HOLLAND-SHIELDING_LC 106.014,53.43 r90 top
CLIP13 "S1411-46R" CLIP_HOLLAND-SHIELDING_LC 38.014,5.43 r180 top
CLIP14 "S1411-46R" CLIP_HOLLAND-SHIELDING_LC 98.014,5.43 r180 top
CLIP15 "S1411-46R" CLIP_HOLLAND-SHIELDING_LC 106.014,13.43 r90 top
CLIP16 "S1411-46R" CLIP_HOLLAND-SHIELDING_LC 81.014,5.43 r180 top
CLIP17 "S1411-46R" CLIP_HOLLAND-SHIELDING_LC 50.014,5.43 r180 top
CLIP18 "S1411-46R" CLIP_HOLLAND-SHIELDING_LC 37.014,95.43 r180 top
D1A "BAV199" SOT95P240X110-3N 66.003,86.968 r270 top (schematic designator D1)
D1B "BAV199" SOT95P240X110-3N 66.003,76.968 r270 top (schematic designator D1)
D1C "BAV199" SOT95P240X110-3N 66.016,66.924 r270 top (schematic designator D1)
D1D "BAV199" SOT95P240X110-3N 66.003,56.968 r270 top (schematic designator D1)
D1E "BAV199" SOT95P240X110-3N 66.003,46.968 r270 top (schematic designator D1)
D1F "BAV199" SOT95P240X110-3N 66.003,36.968 r270 top (schematic designator D1)
D1G "BAV199" SOT95P240X110-3N 66.003,26.968 r270 top (schematic designator D1)
D1H "BAV199" SOT95P240X110-3N 66.003,16.968 r270 top (schematic designator D1)
D2A "BAV199" SOT95P240X110-3N 66.003,83.056 r90 top (schematic designator D2)
D2B "BAV199" SOT95P240X110-3N 66.003,73.056 r90 top (schematic designator D2)
D2C "BAV199" SOT95P240X110-3N 66.016,63.012 r90 top (schematic designator D2)
D2D "BAV199" SOT95P240X110-3N 66.003,53.056 r90 top (schematic designator D2)
D2E "BAV199" SOT95P240X110-3N 66.003,43.056 r90 top (schematic designator D2)
D2F "BAV199" SOT95P240X110-3N 66.003,33.056 r90 top (schematic designator D2)
D2G "BAV199" SOT95P240X110-3N 66.003,23.056 r90 top (schematic designator D2)
D2H "BAV199" SOT95P240X110-3N 66.003,13.056 r90 top (schematic designator D2)
D3 "PRTR5V0U2X" SOT190P230X110-4N 195.521,19.375 r270 top
D4 "PRTR5V0U2X" SOT190P230X110-4N 180.587,18.045 r0 top
D5 "SMBJ12A" DIOM5336X265N 81.864,92.68 r0 top
D6 "SMBJ12A" DIOM5336X265N 73.014,8.43 r180 top
D7 "1N4148WS" SODFL2512X100N 123.014,17.43 r270 top
D8 "1N4148WS" SODFL2512X100N 133.211,70.32 r0 top
D9 "1N4148WS" SODFL2512X100N 121.264,6.93 r180 top
D10 "1N4148WS" SODFL2512X100N 123.264,51.43 r180 top
D11 "PESD3V3L5UY" SOT65P210X110-6N 216.478,27.807 r180 top
D12 "PESD3V3L5UY" SOT65P210X110-6N 211.968,27.987 r180 top
D13 "PESD3V3L5UY" SOT65P210X110-6N 191.672,4.989 r90 top
D14 "CDBU0520-HF" SOD-523F 130.483,32.602 r0 top
D15 "CDBU0520-HF" SOD-523F 130.483,31.332 r0 top
D16 "SMBJ12A" DIOM5336X265N 168.87,89.35 r90 top
D17 "BAT165" SOD2512X110N 147.247,6.305 r180 top
D18 "PESD3V3L5UY" SOT65P210X110-6N 163.45,29.501 r90 top
FL1 "10A/50VDC" FIL_MURATA_BNX02 181.595,88.7 r180 top
FTG1 "Use only in PCB" FIDUCIAL_TOP_C100-200 194.73,95.237 r90 top
FTG2 "Use only in PCB" FIDUCIAL_TOP_S100-200 13.4,4.534 r90 top
FTG3 "Use only in PCB" FIDUCIAL_TOP_S100-200 194.243,95.707 r90 bottom
FTG4 "Use only in PCB" FIDUCIAL_TOP_S100-200 11.774,4.534 r90 bottom
IC1A "OPA2197IDGKR" SOP65P490X110-8N 86.514,84.659 r90 top (schematic designator IC1)
IC1B "OPA2197IDGKR" SOP65P490X110-8N 86.514,74.659 r90 top (schematic designator IC1)
IC1C "OPA2197IDGKR" SOP65P490X110-8N 86.527,64.615 r90 top (schematic designator IC1)
IC1D "OPA2197IDGKR" SOP65P490X110-8N 86.514,54.659 r90 top (schematic designator IC1)
IC1E "OPA2197IDGKR" SOP65P490X110-8N 86.514,44.659 r90 top (schematic designator IC1)
IC1F "OPA2197IDGKR" SOP65P490X110-8N 86.514,34.659 r90 top (schematic designator IC1)
IC1G "OPA2197IDGKR" SOP65P490X110-8N 86.514,24.659 r90 top (schematic designator IC1)
IC1H "OPA2197IDGKR" SOP65P490X110-8N 86.514,14.659 r90 top (schematic designator IC1)
IC2A "AD8253ARMZ" SOP50P490X110-10N 71.845,85.317 r90 top (schematic designator IC2)
IC2B "AD8253ARMZ" SOP50P490X110-10N 71.845,75.317 r90 top (schematic designator IC2)
IC2C "AD8253ARMZ" SOP50P490X110-10N 71.858,65.273 r90 top (schematic designator IC2)
IC2D "AD8253ARMZ" SOP50P490X110-10N 71.845,55.317 r90 top (schematic designator IC2)
IC2E "AD8253ARMZ" SOP50P490X110-10N 71.845,45.317 r90 top (schematic designator IC2)
IC2F "AD8253ARMZ" SOP50P490X110-10N 71.845,35.317 r90 top (schematic designator IC2)
IC2G "AD8253ARMZ" SOP50P490X110-10N 71.845,25.317 r90 top (schematic designator IC2)
IC2H "AD8253ARMZ" SOP50P490X110-10N 71.845,15.317 r90 top (schematic designator IC2)
IC3 "PCF8574ADW" SOIC127P1030X265-16N 113.264,9.68 r90 top
IC4 "FIN1101K8X" SOP50P310X90-8N 188.2,59.048 r270 top
IC5 "FIN1101K8X" SOP50P310X90-8N 185,47.993 r90 top
IC6 "SN65LVDS2DBVR" SOT95P280X145-5N 188.693,43.422 r90 top
IC7 "SN65LVDS2DBVR" SOT95P280X145-5N 188.607,38.998 r90 top
IC8 "SN65LVDS2DBVR" SOT95P280X145-5N 188.675,34.758 r90 top
IC9 "SN65LVDS2DBVR" SOT95P280X145-5N 188.912,30.446 r90 top
IC10 "SN65LVDS1DBVT" SOT95P280X145-5N 188.9,26.259 r90 top
IC11 "SN65LVDS2DBVR" SOT95P280X145-5N 189.035,22.086 r90 top
IC12 "24AA02E48T-I/OT" SOT95P280X145-5N 189.127,12.552 r90 top
IC13 "FIN1101K8X" SOP50P310X90-8N 172.01,59.339 r90 top
IC14 "FIN1101K8X" SOP50P310X90-8N 171.976,51.301 r90 top
IC15 "FIN1101K8X" SOP50P310X90-8N 172.052,44.426 r90 top
IC16 "FIN1101K8X" SOP50P310X90-8N 171.766,36.288 r90 top
IC17 "FIN1101K8X" SOP50P310X90-8N 171.821,30.616 r90 top
IC18 "24AA02E48T-I/OT" SOT95P280X145-5N 172.714,15.898 r90 top
IC19 "SN74LV595APWT" SOP65P640X120-16N 101.199,82.297 r90 top
IC20 "SN74LV595APWT" SOP65P640X120-16N 98.019,11.012 r0 top
IC21 "LT1763CS8#PBF" SOIC127P600X175-8N 117.663,53.779 r0 top
IC22 "LT1761ES5-SD#TRMPBF" SOT95P280X100-5N 118.814,43.465 r180 top
IC23 "LT1761ES5-BYP#TRMPBF" SOT95P280X100-5N 118.764,47.019 r180 top
IC24 "LT1964EDD#PBF" LT-DD-8_V 113.139,24.184 r0 top
IC25 "CC6-1212DF-E" CC6-1212DF-E 148.184,73.165 r180 top
IC26 "LT1964ES5-SD#TRMPBF" SOT95P280X100-5N 117.264,28.43 r180 top
IC27 "LM393AD" SOIC127P600X175-8N 122.264,11.68 r270 top
IC28 "TPS62175DQC" SON50P200X300X80-11N-R94X250 140.762,68.965 r0 top
IC29 "LT1761ES5-SD#TRMPBF" SOT95P280X100-5N 109.814,40.732 r90 top
IC30 "LT1761ES5-BYP#TRMPBF" SOT95P280X100-5N 114.415,39.579 r90 top
IC31 "TPS62175DQC" SON50P200X300X80-11N-R94X250 135.211,65.57 r180 top
IC32 "LT1763CS8#PBF" SOIC127P600X175-8N 118.514,33.43 r0 top
IC33 "LTC6655CHLS8-4.096" LCCS127P500X500X145-8N 96.764,22.184 r90 top
IC34 "LTC6655BHMS8-4.096#PBF" SOP65P490X110-8N 101.839,22.255 r90 top
IC35 "OPA2197IDGKR" SOP65P490X110-8N 100.464,62.53 r0 top
IC36 "LTC2320HUKG-16#PBF" QFN50P700X800X80_HS-53M 99.184,42.965 r0 top
IC37 "74HC4066PW" SOP65P640X110-14N 149.77,39.11 r180 top
IC38 "74HC4066PW" SOP65P640X110-14N 149.77,32.85 r180 top
IC39 "TLC555ID" SOIC127P600X175-8N 137.084,31.967 r0 top
IC40 "LM75AIMM/NOPB" SOP65P490X109-8N 162.17,110.95 r180 top
IC41 "MIC5219-3.3YM5" SOT95P280X145-5N 140.567,5.33 r0 top
IC42 "24AA025E48-I/SN" SOIC127P600X175-8N 148.701,143.791 r90 top
IC43 "24AA025E48-I/SN" SOIC127P600X175-8N 148.701,133.629 r90 top
IC44 "24AA025E48-I/SN" SOIC127P600X175-8N 141.318,133.629 r90 top
IC45 "24AA025E48-I/SN" SOIC127P600X175-8N 141.318,143.791 r90 top
IC46 "74HC4066PW" SOP65P640X110-14N 149.792,26.498 r180 top
J1 "" 3M_N2530-6002RB 196.612,44.28 r270 top
J2 "" 3M_N2530-6002RB 177.842,44.306 r270 top
J3 "Header 26" 3M_N2526-6002RB 21.5,51 r90 top locked
J8 "P1" AMPHENOL_10052825-101LF 210.289,9.5 r90 top locked
J9 "P6" AMPHENOL_10052838-101LF 210.289,88.5 r90 top locked
J10 "Mini-Fit Jr.™" MOLEX_39-30-0040 203.055,72.217 r270 top
L1A "2x6.5mH" IND_WURTH_WE-SL2 53.08,86.124 r0 top (schematic designator L1)
L1B "2x6.5mH" IND_WURTH_WE-SL2 53.08,76.124 r0 top (schematic designator L1)
L1C "2x6.5mH" IND_WURTH_WE-SL2 53.093,66.08 r0 top (schematic designator L1)
L1D "2x6.5mH" IND_WURTH_WE-SL2 53.08,56.124 r0 top (schematic designator L1)
L1E "2x6.5mH" IND_WURTH_WE-SL2 53.08,46.124 r0 top (schematic designator L1)
L1F "2x6.5mH" IND_WURTH_WE-SL2 53.08,36.124 r0 top (schematic designator L1)
L1G "2x6.5mH" IND_WURTH_WE-SL2 53.08,26.124 r0 top (schematic designator L1)
L1H "2x6.5mH" IND_WURTH_WE-SL2 53.08,16.124 r0 top (schematic designator L1)
L2 "10uH" IND_MURATA-PS_8400 120.514,85.18 r270 top
L3 "10uH" IND_MURATA-PS_8400 120.264,74.93 r270 top
L4 "10uH" IND_MURATA-PS_8400 152.618,65.545 r90 top
L5 "10uH" IND_MURATA-PS_8400 124.514,64.18 r270 top
L6 "10uH" IND_MURATA-PS_8400 120.514,68.68 r90 top
L7 "10uH" IND_MURATA-PS_8400 144.735,68.785 r270 top
L8 "10uH" IND_MURATA-PS_8400 145.141,58.679 r270 top
L9 "10uH" IND_MURATA-PS_8400 130.883,64.245 r270 top
L10 "10uH" IND_MURATA-PS_8400 128.196,57.08 r180 top
LD1 "Green/Green" LED_DIALIGHT_571-0122F 2.764,89 r0 top
LD2 "Green/Green" LED_DIALIGHT_571-0122F 2.764,67 r0 top
LD3 "Green/Green" LED_DIALIGHT_571-0122F -3.04,-15.4 r0 top
LD4 "Green/Green" LED_DIALIGHT_571-0122F 2.764,45 r0 top
LD5 "Green/Green" LED_DIALIGHT_571-0122F 2.764,23 r0 top
LD6 "Green" LED_KINGBRIGHT_KPH-1608CGCK 157.27,114.25 r180 top
LD7 "Green" LED_KINGBRIGHT_KPH-1608CGCK 165.86,69.851 r90 top
LD8 "Green" LED_KINGBRIGHT_KPH-1608CGCK 163.16,69.851 r90 top
M1 "Plated Hole" MTG300_600#1 156.514,6.43 r180 top
M2 "Plated Hole" MTG300_600#1 156.514,94.43 r180 top
M3 "Plated Hole" MTG300_600#2 4.138,94.45 r0 top locked
M4 "Plated Hole" MTG300_600#2 4.138,5.55 r0 top locked
MP1 "M3 x 12mm" 9774120360 28.414,93.03 r0 top
MP2 "M3 x 12mm" 9774120360 28.414,8.03 r0 top
P2 "61030421121" 61030421121 13.5,94.2 r270 top
P3 "61030421121" 61030421121 11.5,83.2 r270 top
P4 "61030421121" 61030421121 11.5,72.2 r270 top
P5 "61030421121" 61030421121 11.5,61.2 r270 top
P6 "61030421121" 61030421121 11.5,50.2 r270 top
P7 "61030421121" 61030421121 11.5,39.2 r270 top
P8 "61030421121" 61030421121 11.5,28.2 r270 top
P9 "61030421121" 61030421121 11.5,17.2 r270 top
R1A "Undefined" RESC1608X55N 53.334,88.41 r0 top (schematic designator R1)
R1B "Undefined" RESC1608X55N 53.334,78.41 r0 top (schematic designator R1)
R1C "Undefined" RESC1608X55N 53.347,68.366 r0 top (schematic designator R1)
R1D "Undefined" RESC1608X55N 53.334,58.41 r0 top (schematic designator R1)
R1E "Undefined" RESC1608X55N 53.334,48.41 r0 top (schematic designator R1)
R1F "Undefined" RESC1608X55N 53.334,38.41 r0 top (schematic designator R1)
R1G "Undefined" RESC1608X55N 53.334,28.41 r0 top (schematic designator R1)
R1H "Undefined" RESC1608X55N 53.334,18.41 r0 top (schematic designator R1)
R2A "0" RESC1608X55N 58.922,88.11 r90 top (schematic designator R2)
R2B "0" RESC1608X55N 58.922,78.11 r90 top (schematic designator R2)
R2C "0" RESC1608X55N 58.935,68.066 r90 top (schematic designator R2)
R2D "0" RESC1608X55N 58.922,58.11 r90 top (schematic designator R2)
R2E "0" RESC1608X55N 58.922,48.11 r90 top (schematic designator R2)
R2F "0" RESC1608X55N 58.922,38.11 r90 top (schematic designator R2)
R2G "0" RESC1608X55N 58.922,28.11 r90 top (schematic designator R2)
R2H "0" RESC1608X55N 58.922,18.11 r90 top (schematic designator R2)
R3A "1k8" RESC1608X55N 62.732,88.872 r0 top (schematic designator R3)
R3B "1k8" RESC1608X55N 62.732,78.872 r0 top (schematic designator R3)
R3C "1k8" RESC1608X55N 62.745,68.828 r0 top (schematic designator R3)
R3D "1k8" RESC1608X55N 62.732,58.872 r0 top (schematic designator R3)
R3E "1k8" RESC1608X55N 62.732,48.872 r0 top (schematic designator R3)
R3F "1k8" RESC1608X55N 62.732,38.872 r0 top (schematic designator R3)
R3G "1k8" RESC1608X55N 62.732,28.872 r0 top (schematic designator R3)
R3H "1k8" RESC1608X55N 62.732,18.872 r0 top (schematic designator R3)
R4A "100k" RESC1608X55N 60.446,88.11 r90 top (schematic designator R4)
R4B "100k" RESC1608X55N 60.446,78.11 r90 top (schematic designator R4)
R4C "100k" RESC1608X55N 60.459,68.066 r90 top (schematic designator R4)
R4D "100k" RESC1608X55N 60.446,58.11 r90 top (schematic designator R4)
R4E "100k" RESC1608X55N 60.446,48.11 r90 top (schematic designator R4)
R4F "100k" RESC1608X55N 60.446,38.11 r90 top (schematic designator R4)
R4G "100k" RESC1608X55N 60.446,28.11 r90 top (schematic designator R4)
R4H "100k" RESC1608X55N 60.446,18.11 r90 top (schematic designator R4)
R5A "49R9" RESC6331X70N 46.264,86.755 r90 top (schematic designator R5)
R5B "49R9" RESC6331X70N 46.264,76.755 r90 top (schematic designator R5)
R5C "49R9" RESC6331X70N 46.277,66.711 r90 top (schematic designator R5)
R5D "49R9" RESC6331X70N 46.264,56.755 r90 top (schematic designator R5)
R5E "49R9" RESC6331X70N 46.264,46.755 r90 top (schematic designator R5)
R5F "49R9" RESC6331X70N 46.264,36.755 r90 top (schematic designator R5)
R5G "49R9" RESC6331X70N 46.264,26.755 r90 top (schematic designator R5)
R5H "49R9" RESC6331X70N 46.264,16.755 r90 top (schematic designator R5)
R6A "51" RESC1005X40N 89.173,83.506 r90 top (schematic designator R6)
R6B "51" RESC1005X40N 89.173,73.506 r90 top (schematic designator R6)
R6C "51" RESC1005X40N 89.186,63.462 r90 top (schematic designator R6)
R6D "51" RESC1005X40N 89.173,53.506 r90 top (schematic designator R6)
R6E "51" RESC1005X40N 89.173,43.506 r90 top (schematic designator R6)
R6F "51" RESC1005X40N 89.173,33.506 r90 top (schematic designator R6)
R6G "51" RESC1005X40N 89.173,23.506 r90 top (schematic designator R6)
R6H "51" RESC1005X40N 89.173,13.506 r90 top (schematic designator R6)
R7A "24k" RESC1608X55N 81.264,89.43 r180 top (schematic designator R7)
R7B "24k" RESC1608X55N 81.239,79.455 r180 top (schematic designator R7)
R7C "24k" RESC1608X55N 81.264,69.405 r180 top (schematic designator R7)
R7D "24k" RESC1608X55N 81.264,59.355 r180 top (schematic designator R7)
R7E "24k" RESC1608X55N 81.264,49.43 r180 top (schematic designator R7)
R7F "24k" RESC1608X55N 81.239,39.455 r180 top (schematic designator R7)
R7G "24k" RESC1608X55N 81.264,29.43 r180 top (schematic designator R7)
R7H "24k" RESC1608X55N 81.239,19.43 r180 top (schematic designator R7)
R8A "Undefined" RESC1608X55N 53.334,83.838 r0 top (schematic designator R8)
R8B "Undefined" RESC1608X55N 53.334,73.838 r0 top (schematic designator R8)
R8C "Undefined" RESC1608X55N 53.347,63.794 r0 top (schematic designator R8)
R8D "Undefined" RESC1608X55N 53.334,53.838 r0 top (schematic designator R8)
R8E "Undefined" RESC1608X55N 53.334,43.838 r0 top (schematic designator R8)
R8F "Undefined" RESC1608X55N 53.334,33.838 r0 top (schematic designator R8)
R8G "Undefined" RESC1608X55N 53.334,23.838 r0 top (schematic designator R8)
R8H "Undefined" RESC1608X55N 53.334,13.838 r0 top (schematic designator R8)
R9A "0" RESC1608X55N 58.922,85.062 r270 top (schematic designator R9)
R9B "0" RESC1608X55N 58.922,75.062 r270 top (schematic designator R9)
R9C "0" RESC1608X55N 58.935,65.018 r270 top (schematic designator R9)
R9D "0" RESC1608X55N 58.922,55.062 r270 top (schematic designator R9)
R9E "0" RESC1608X55N 58.922,45.062 r270 top (schematic designator R9)
R9F "0" RESC1608X55N 58.922,35.062 r270 top (schematic designator R9)
R9G "0" RESC1608X55N 58.922,25.062 r270 top (schematic designator R9)
R9H "0" RESC1608X55N 58.922,15.062 r270 top (schematic designator R9)
R10A "1k8" RESC1608X55N 62.732,84.046 r0 top (schematic designator R10)
R10B "1k8" RESC1608X55N 62.732,74.046 r0 top (schematic designator R10)
R10C "1k8" RESC1608X55N 62.745,64.002 r0 top (schematic designator R10)
R10D "1k8" RESC1608X55N 62.732,54.046 r0 top (schematic designator R10)
R10E "1k8" RESC1608X55N 62.732,44.046 r0 top (schematic designator R10)
R10F "1k8" RESC1608X55N 62.732,34.046 r0 top (schematic designator R10)
R10G "1k8" RESC1608X55N 62.732,24.046 r0 top (schematic designator R10)
R10H "1k8" RESC1608X55N 62.732,14.046 r0 top (schematic designator R10)
R11A "100k" RESC1608X55N 60.446,85.062 r270 top (schematic designator R11)
R11B "100k" RESC1608X55N 60.446,75.062 r270 top (schematic designator R11)
R11C "100k" RESC1608X55N 60.459,65.018 r270 top (schematic designator R11)
R11D "100k" RESC1608X55N 60.446,55.062 r270 top (schematic designator R11)
R11E "100k" RESC1608X55N 60.446,45.062 r270 top (schematic designator R11)
R11F "100k" RESC1608X55N 60.446,35.062 r270 top (schematic designator R11)
R11G "100k" RESC1608X55N 60.446,25.062 r270 top (schematic designator R11)
R11H "100k" RESC1608X55N 60.446,15.062 r270 top (schematic designator R11)
R12A "51" RESC1005X40N 89.173,87.756 r270 top (schematic designator R12)
R12B "51" RESC1005X40N 89.173,77.756 r270 top (schematic designator R12)
R12C "51" RESC1005X40N 89.186,67.712 r270 top (schematic designator R12)
R12D "51" RESC1005X40N 89.173,57.756 r270 top (schematic designator R12)
R12E "51" RESC1005X40N 89.173,47.756 r270 top (schematic designator R12)
R12F "51" RESC1005X40N 89.173,37.756 r270 top (schematic designator R12)
R12G "51" RESC1005X40N 89.173,27.756 r270 top (schematic designator R12)
R12H "51" RESC1005X40N 89.173,17.756 r270 top (schematic designator R12)
R13A "2k4" RESC1005X40N 89.014,89.755 r180 top (schematic designator R13)
R13B "2k4" RESC1005X40N 89.014,79.755 r180 top (schematic designator R13)
R13C "2k4" RESC1005X40N 89.027,69.711 r180 top (schematic designator R13)
R13D "2k4" RESC1005X40N 89.014,59.755 r180 top (schematic designator R13)
R13E "2k4" RESC1005X40N 89.014,49.755 r180 top (schematic designator R13)
R13F "2k4" RESC1005X40N 89.014,39.755 r180 top (schematic designator R13)
R13G "2k4" RESC1005X40N 89.014,29.755 r180 top (schematic designator R13)
R13H "2k4" RESC1005X40N 89.014,19.755 r180 top (schematic designator R13)
R14 "100" RESC1005X40N 190.1,59.197 r270 top
R15 "100" RESC1005X40N 191.043,43.523 r270 top
R16 "100" RESC1005X40N 191.206,38.849 r270 top
R17 "100" RESC1005X40N 191.275,34.858 r270 top
R18 "100" RESC1005X40N 191.261,30.296 r270 top
R19 "100" RESC1005X40N 191.19,22.212 r270 top
R20 "100" RESC1005X40N 170.22,59.343 r90 top
R21 "100" RESC1005X40N 170.287,51.063 r90 top
R22 "100" RESC1005X40N 170.267,44.239 r90 top
R23 "100" RESC1005X40N 169.992,36.253 r90 top
R24 "100" RESC1005X40N 170.037,30.657 r90 top
R25 "10k" RESC1005X40N 14.289,95.155 r180 top
R26 "220" RESC1608X55N 12.764,88.68 r90 top
R27 "10k" RESC1005X40N 15.714,94.705 r270 top
R28 "220" RESC1608X55N 15.014,88.93 r0 top
R29 "10k" RESC1005X40N 19.514,94.705 r270 top
R30 "220" RESC1608X55N 18.264,88.83 r0 top
R31 "10k" RESC1005X40N 23.464,94.755 r270 top
R32 "220" RESC1608X55N 22.514,88.83 r0 top
R33 "10k" RESC1005X40N 17.339,9.18 r90 top
R34 "220" RESC1608X55N 24.45,16 r270 top
R35 "220" RESC1608X55N 18.264,96.43 r0 top
R36 "10k" RESC1005X40N 20.764,9.155 r90 top
R37 "220" RESC1608X55N 28.2,16 r270 top
R38 "220" RESC1608X55N 15.264,96.43 r0 top
R39 "10k" RESC1005X40N 9.689,8.83 r90 top
R40 "220" RESC1608X55N 7.844,13.08 r0 top
R41 "Undefined" RESC1608X55N 109.014,86.43 r270 top
R42 "Undefined" RESC1608X55N 112.014,86.43 r270 top
R43 "10k" RESC1005X40N 13.914,9.155 r90 top
R44 "220" RESC1608X55N 22.77,16 r270 top
R45 "Undefined" RESC1608X55N 109.814,89.53 r0 top
R46 "0" RESC1608X55N 8.239,92.552 r180 top
R47 "0" RESC1608X55N 9.366,6.055 r180 top
R48 "22" RESC1005X40N 212.903,30.446 r270 top
R49 "10M" RESC2113X55N 68.47,3.65 r0 top
R50 "10M" RESC2113X55N 40.37,3.55 r180 top
R51 "24k" RESC1608X55N 112.264,54.43 r180 top
R52 "2k7" RESC1608X55N 112.264,55.93 r0 top
R53 "2k7" RESC1608X55N 123.589,24.63 r0 top
R54 "24k" RESC1608X55N 115.787,47.23 r270 top
R55 "5k1" RESC1005X40N 117.389,49.641 r270 top
R56 "Undefined" RESC1608X55N 125.514,76.93 r270 top
R57 "0" RESC1005X40N 154.264,83.93 r90 top
R58 "36k" RESC1608X55N 125.383,80.449 r270 top
R59 "10k" RESC1005X40N 121.264,17.43 r270 top
R60 "2k4" RESC1005X40N 124.514,17.43 r90 top
R61 "24k" RESC1608X55N 114.264,28.43 r270 top
R62 "62k" RESC1005X40N 119.014,14.68 r90 top
R63 "2k7" RESC1608X55N 112.014,29.18 r0 top
R64 "24k" RESC1608X55N 133.061,68.345 r180 top
R65 "5k1" RESC1005X40N 123.514,6.93 r90 top
R66 "270k" RESC1608X55N 141.211,64.32 r270 top
R67 "24k" RESC1608X55N 125.764,11.68 r90 top
R68 "82k" RESC1608X55N 139.711,65.57 r90 top
R69 "5k1" RESC1005X40N 141.711,66.57 r180 top
R70 "51k" RESC1005X40N 113.764,42.18 r180 top
R71 "47k" RESC1005X40N 115.764,42.18 r180 top
R72 "33k" RESC1005X40N 137.961,66.07 r0 top
R73 "62k" RESC1005X40N 113.264,32.93 r270 top
R74 "5k1" RESC1005X40N 137.961,67.07 r180 top
R75 "20k" RESC1005X40N 114.264,32.93 r90 top
R76 "1k" RESC1608X55N 119.729,21.614 r270 top
R77 "82k" RESC1608X55N 102.964,36.505 r90 top
R78 "0" RESC1005X40N 101.514,51.93 r0 top
R79 "100" RESC1005X40N 103.764,48.68 r270 top
R80 "0" RESC1005X40N 102.052,18.563 r180 top
R81 "0" RESC1005X40N 101.518,26.488 r90 top
R82 "0" RESC1005X40N 104.789,24.205 r270 top
R83 "24k" RESC1608X55N 100.514,72.78 r180 top
R84 "0" RESC1005X40N 217.939,20.98 r270 top
R85 "0" RESC1005X40N 216.539,20.98 r270 top
R86 "0" RESC1005X40N 212.3,23.6 r270 top
R87 "0" RESC1005X40N 213.718,20.8 r270 top
R88 "0" RESC1005X40N 211.178,23.6 r270 top
R89 "0" RESC1005X40N 212.593,20.8 r270 top
R90 "22" RESC1005X40N 195.063,4.504 r0 top
R91 "22" RESC1005X40N 195.063,5.225 r0 top
R92 "22" RESC1005X40N 195.063,6.039 r0 top
R93 "22" RESC1005X40N 215.239,30.251 r270 top
R94 "22" RESC1005X40N 195.063,7.39 r0 top
R95 "22" RESC1005X40N 210.729,30.61 r270 top
R96 "22" RESC1005X40N 195.063,8.833 r0 top
R97 "22" RESC1005X40N 195.063,9.555 r0 top
R98 "22" RESC1005X40N 215.378,25.509 r90 top
R99 "22" RESC1005X40N 195.063,10.998 r0 top
R100 "0" RESC1005X40N 207.364,32.359 r90 top
R101 "220" RESC1005X40N 179.271,5.779 r0 top
R102 "10k" RESC1005X40N 173.99,3.354 r180 top
R103 "10k" RESC1005X40N 154.438,38.885 r0 top
R104 "10k" RESC1005X40N 145.001,38.035 r0 top
R105 "10k" RESC1005X40N 144.967,39.985 r0 top
R106 "10k" RESC1005X40N 144.967,40.91 r0 top
R107 "10k" RESC1005X40N 144.967,38.844 r0 top
R108 "2k7" RESC1608X55N 143.418,44.475 r180 top